# Altium PCB Headstage_withFPGA.PcbDoc
Units mm, origin at the board's own origin, x right, y up, seen from the top; angles counter-clockwise.
Board outline 41.84 x 41.84 mm, 2 copper layers (Top Layer, Bottom Layer); 1 components, 0 nets, 144 pads, 0 vias.
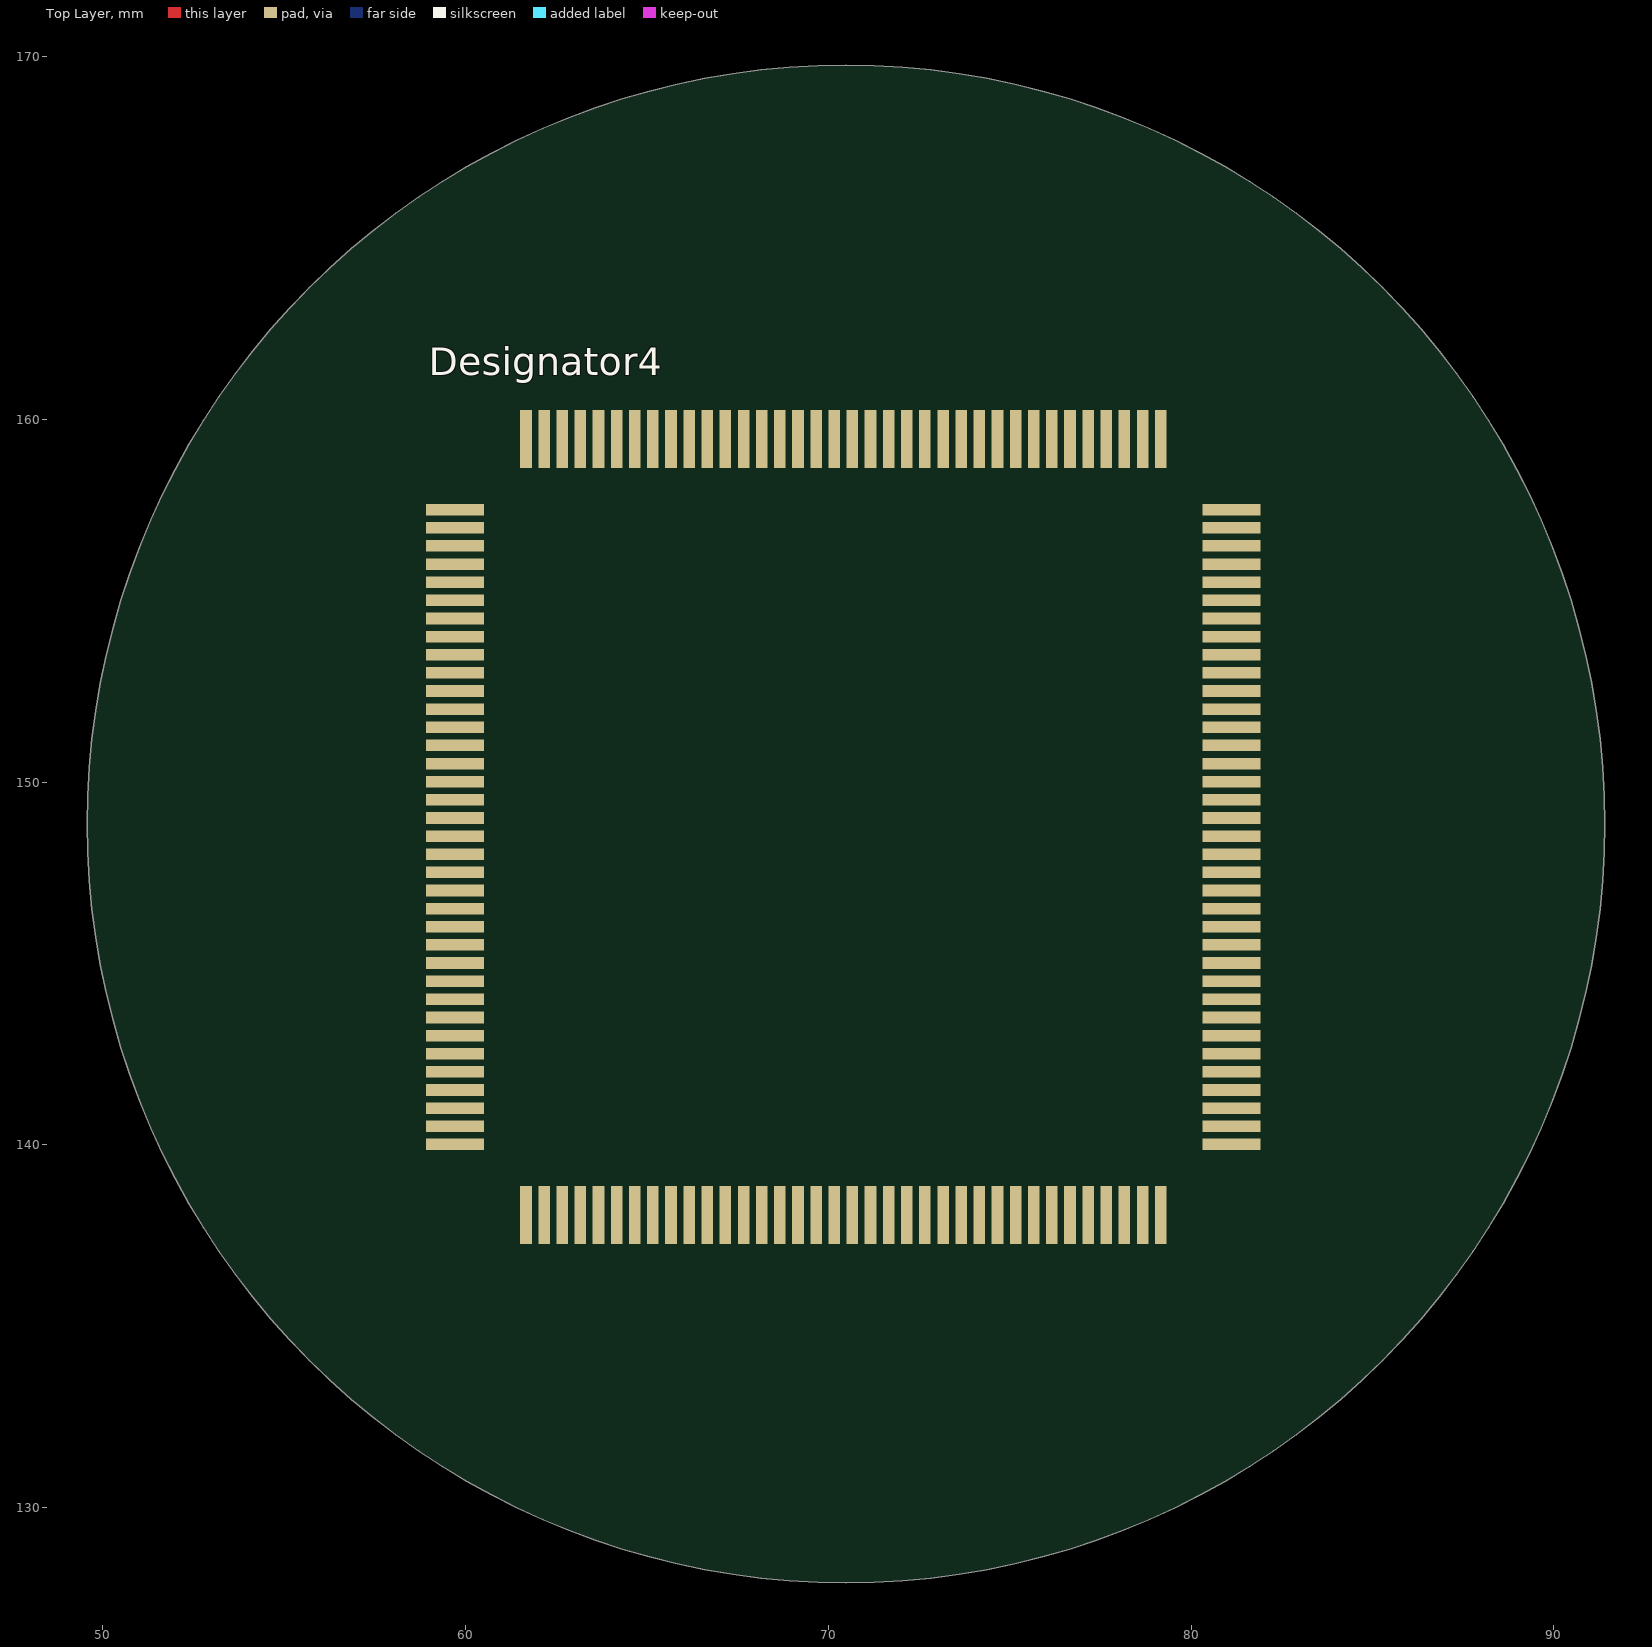
[diagram p0: Top Layer view]
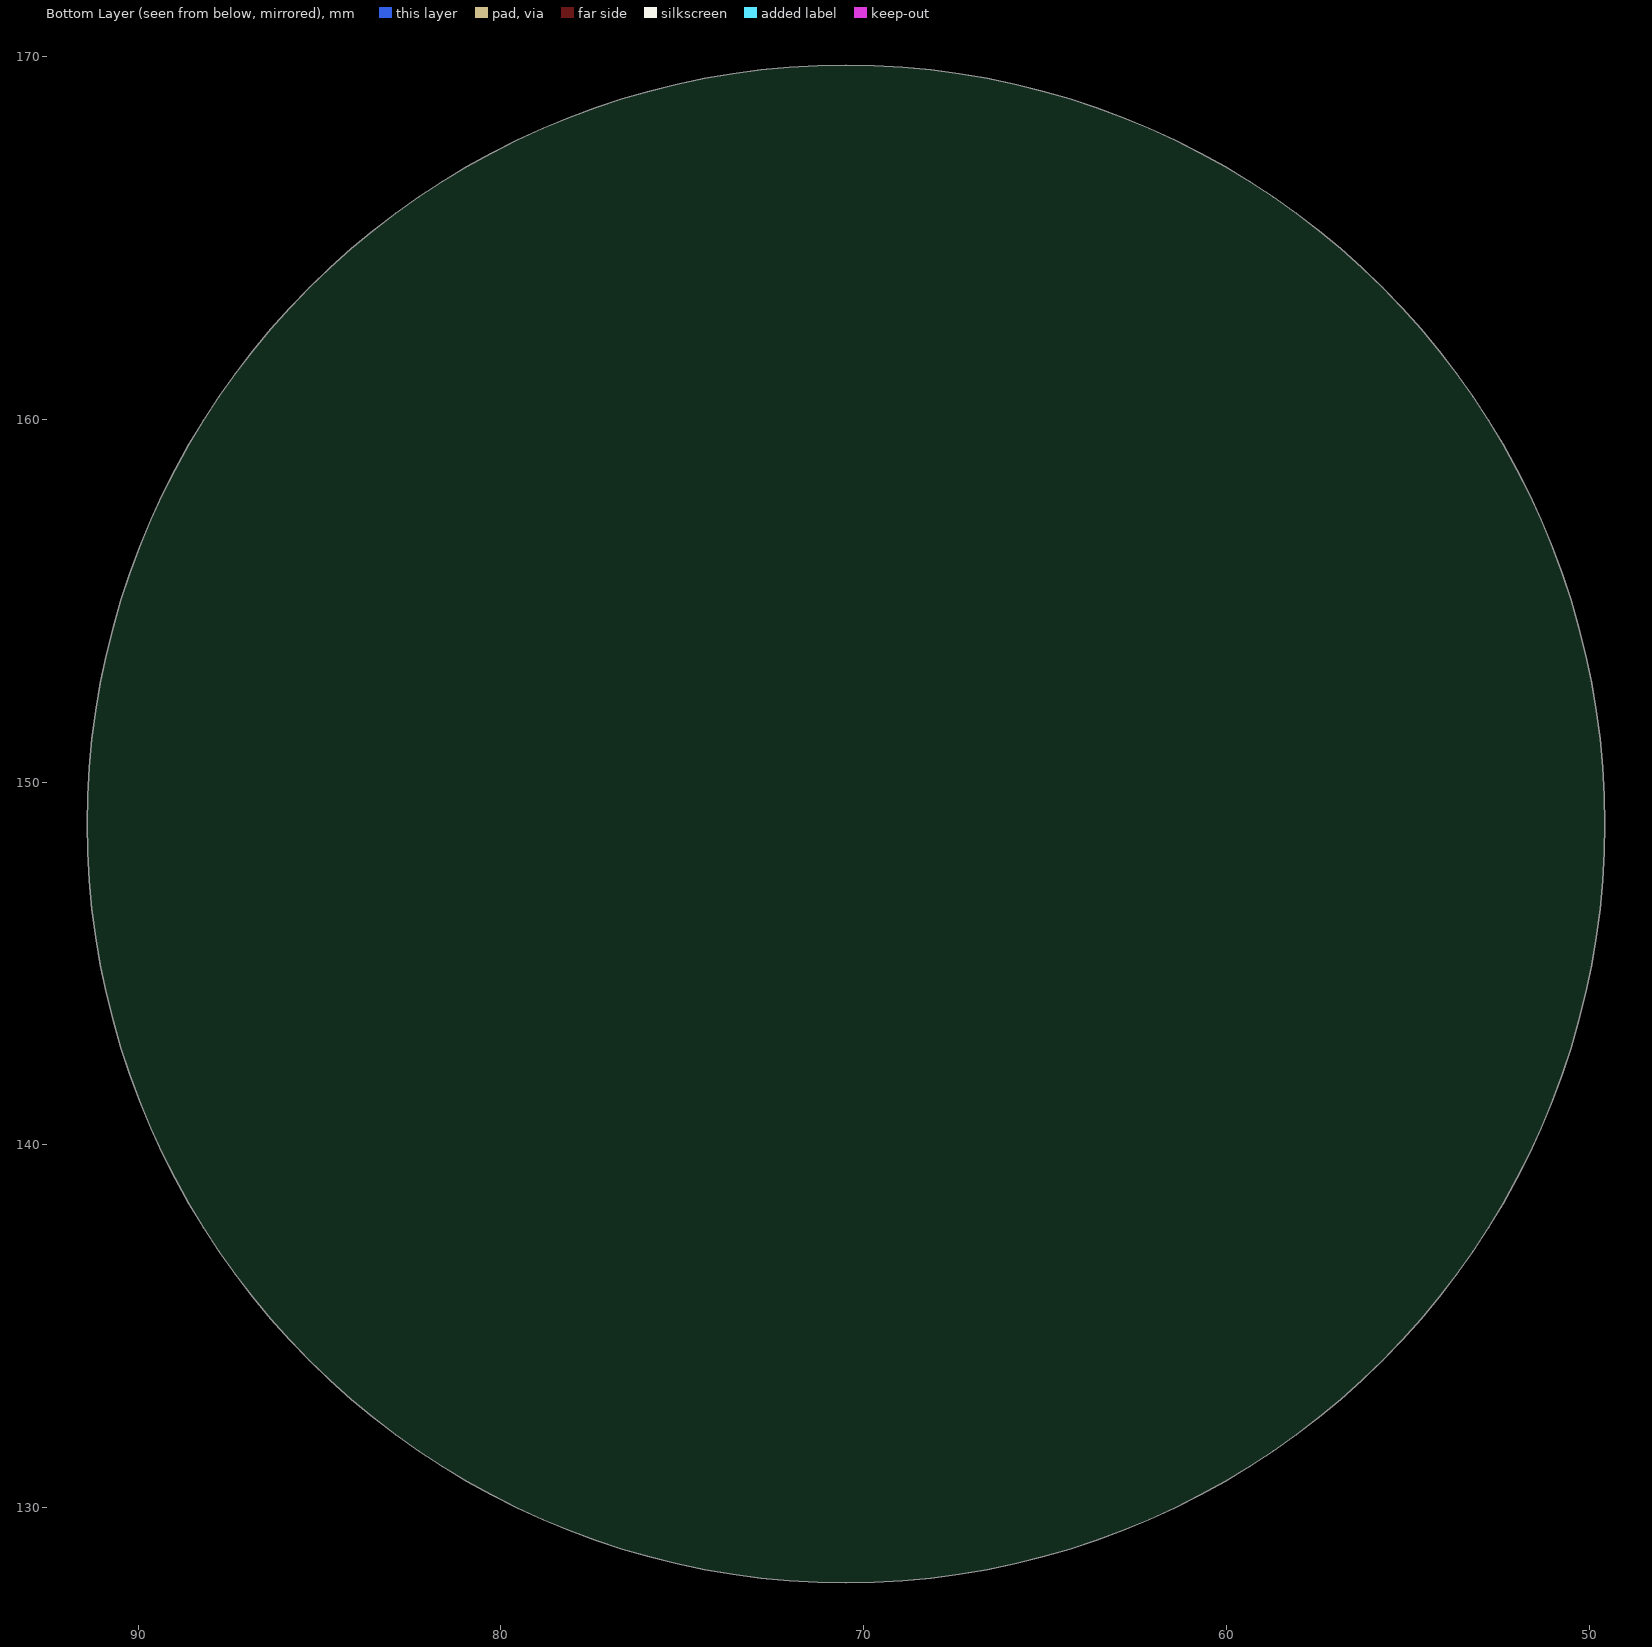
[diagram p1: Bottom Layer view, seen from below]

## Layer stack, top to bottom
Top Layer: signal copper 0.0356
Dielectric: dielectric 0.32, FR-4, Dk 4.8
Bottom Layer: signal copper 0.0356

## Board outline
70.485,127.923 cw(c70.485,148.844) 49.564,148.844 cw(c70.485,148.844) 70.485,169.765 cw(c70.485,148.844) 91.406,148.844 cw(c70.485,148.844)

## Design rules (kind name [scope] priority, off if disabled: settings)
Clearance [All] p1: gap=0.254
PolygonConnect [All] p1: connectstyle=Relief reliefconductorwidth=0.254 reliefentries=4 polygonreliefangle="90 Angle" airgapwidth=0.254
RoutingVias [All] p1: holewidth=0.711 width=1.27 viastyle="Through Hole" minholewidth=0.711 minwidth=1.27 maxholewidth=0.711 maxwidth=1.27
SolderMaskExpansion [All] p1: expansion=0.102
Width [All] p1: maxlimit=0.254 minlimit=0.254 preferedwidth=0.254
28 further rules are at their usual default settings.

## Components (designator, comment, footprint, x,y, rotation, side; value= is the part's Value field where it differs from the comment)
Designator4 "Comment" TQG144 58.293,141.986 r0 top

## Footprints (in the part's own frame and the unit in brackets; to place one, negate y for a bottom-side part, rotate by r counter-clockwise, add the part's x,y. Pads: shape width x height; smd on the part's side, far side on the other; paste and mask are expansions set on the pad)
TQG144 [mm]
  rect 1.6x0.32 smd mask+0.06: P1(1.418,15.524) P2(1.418,15.024) P3(1.418,14.524) P4(1.418,14.024) P5(1.418,13.524) P6(1.418,13.024) P7(1.418,12.524) P8(1.418,12.024) P9(1.418,11.524) P10(1.418,11.024) P11(1.418,10.524) P12(1.418,10.024) P13(1.418,9.524) P14(1.418,9.024) P15(1.418,8.524) P16(1.418,8.024) P17(1.418,7.524) P18(1.418,7.024) P19(1.418,6.524) P20(1.418,6.024) P21(1.418,5.524) P22(1.418,5.024) P23(1.418,4.524) P24(1.418,4.024) P25(1.418,3.524) P26(1.418,3.024) P27(1.418,2.524) P28(1.418,2.024) P29(1.418,1.524) P30(1.418,1.024) P31(1.418,0.524) P32(1.418,0.024) P33(1.418,-0.476) P34(1.418,-0.976) P35(1.418,-1.476) P36(1.418,-1.976) P73(22.818,-1.976) P74(22.818,-1.476) P75(22.818,-0.976) P76(22.818,-0.476) P77(22.818,0.024) P78(22.818,0.524) P79(22.818,1.024) P80(22.818,1.524) P81(22.818,2.024) P82(22.818,2.524) P83(22.818,3.024) P84(22.818,3.524) P85(22.818,4.024) P86(22.818,4.524) P87(22.818,5.024) P88(22.818,5.524) P89(22.818,6.024) P90(22.818,6.524) P91(22.818,7.024) P92(22.818,7.524) P93(22.818,8.024) P94(22.818,8.524) P95(22.818,9.024) P96(22.818,9.524) P97(22.818,10.024) P98(22.818,10.524) P99(22.818,11.024) P100(22.818,11.524) P101(22.818,12.024) P102(22.818,12.524) P103(22.818,13.024) P104(22.818,13.524) P105(22.818,14.024) P106(22.818,14.524) P107(22.818,15.024) P108(22.818,15.524)
  rect 0.32x1.6 smd mask+0.06: P37(3.368,-3.925) P38(3.868,-3.925) P39(4.368,-3.925) P40(4.868,-3.925) P41(5.368,-3.925) P42(5.868,-3.925) P43(6.368,-3.925) P44(6.868,-3.925) P45(7.368,-3.925) P46(7.868,-3.925) P47(8.368,-3.925) P48(8.868,-3.925) P49(9.368,-3.925) P50(9.868,-3.925) P51(10.368,-3.925) P52(10.868,-3.925) P53(11.368,-3.925) P54(11.868,-3.925) P55(12.368,-3.925) P56(12.868,-3.925) P57(13.368,-3.925) P58(13.868,-3.925) P59(14.368,-3.925) P60(14.868,-3.925) P61(15.368,-3.925) P62(15.868,-3.925) P63(16.368,-3.925) P64(16.868,-3.925) P65(17.368,-3.925) P66(17.868,-3.925) P67(18.368,-3.925) P68(18.868,-3.925) P69(19.368,-3.925) P70(19.868,-3.925) P71(20.368,-3.925) P72(20.868,-3.925) P109(20.868,17.475) P110(20.368,17.475) P111(19.868,17.475) P112(19.368,17.475) P113(18.868,17.475) P114(18.368,17.475) P115(17.868,17.475) P116(17.368,17.475) P117(16.868,17.475) P118(16.368,17.475) P119(15.868,17.475) P120(15.368,17.475) P121(14.868,17.475) P122(14.368,17.475) P123(13.868,17.475) P124(13.368,17.475) P125(12.868,17.475) P126(12.368,17.475) P127(11.868,17.475) P128(11.368,17.475) P129(10.868,17.475) P130(10.368,17.475) P131(9.868,17.475) P132(9.368,17.475) P133(8.868,17.475) P134(8.368,17.475) P135(7.868,17.475) P136(7.368,17.475) P137(6.868,17.475) P138(6.368,17.475) P139(5.868,17.475) P140(5.368,17.475) P141(4.868,17.475) P142(4.368,17.475) P143(3.868,17.475) P144(3.368,17.475)

## Nets (pads, with @x,y where several pads share a name; then routed paths per layer and width w, separated by ;. In a path a pad name is that pad's centre, name@x,y a point inside that pad or via, vN(x,y) a via of type N, cw(c..) or ccw(c..) an arc to the next point about the centre after c; other vN are vias at no path point)
pads on no net: Designator4.P1 Designator4.P2 Designator4.P3 Designator4.P4 Designator4.P5 Designator4.P6 Designator4.P7 Designator4.P8 Designator4.P9 Designator4.P10 Designator4.P11 Designator4.P12 Designator4.P13 Designator4.P14 Designator4.P15 Designator4.P16 Designator4.P17 Designator4.P18 Designator4.P19 Designator4.P20 Designator4.P21 Designator4.P22 Designator4.P23 Designator4.P24 Designator4.P25 Designator4.P26 Designator4.P27 Designator4.P28 Designator4.P29 Designator4.P30 Designator4.P31 Designator4.P32 Designator4.P33 Designator4.P34 Designator4.P35 Designator4.P36 Designator4.P37 Designator4.P38 Designator4.P39 Designator4.P40 Designator4.P41 Designator4.P42 Designator4.P43 Designator4.P44 Designator4.P45 Designator4.P46 Designator4.P47 Designator4.P48 Designator4.P49 Designator4.P50 Designator4.P51 Designator4.P52 Designator4.P53 Designator4.P54 Designator4.P55 Designator4.P56 Designator4.P57 Designator4.P58 Designator4.P59 Designator4.P60 Designator4.P61 Designator4.P62 Designator4.P63 Designator4.P64 Designator4.P65 Designator4.P66 Designator4.P67 Designator4.P68 Designator4.P69 Designator4.P70 Designator4.P71 Designator4.P72 Designator4.P73 Designator4.P74 Designator4.P75 Designator4.P76 Designator4.P77 Designator4.P78 Designator4.P79 Designator4.P80 Designator4.P81 Designator4.P82 Designator4.P83 Designator4.P84 Designator4.P85 Designator4.P86 Designator4.P87 Designator4.P88 Designator4.P89 Designator4.P90 Designator4.P91 Designator4.P92 Designator4.P93 Designator4.P94 Designator4.P95 Designator4.P96 Designator4.P97 Designator4.P98 Designator4.P99 Designator4.P100 Designator4.P101 Designator4.P102 Designator4.P103 Designator4.P104 Designator4.P105 Designator4.P106 Designator4.P107 Designator4.P108 Designator4.P109 Designator4.P110 Designator4.P111 Designator4.P112 Designator4.P113 Designator4.P114 Designator4.P115 Designator4.P116 Designator4.P117 Designator4.P118 Designator4.P119 Designator4.P120 Designator4.P121 Designator4.P122 Designator4.P123 Designator4.P124 Designator4.P125 Designator4.P126 Designator4.P127 Designator4.P128 Designator4.P129 Designator4.P130 Designator4.P131 Designator4.P132 Designator4.P133 Designator4.P134 Designator4.P135 Designator4.P136 Designator4.P137 Designator4.P138 Designator4.P139 Designator4.P140 Designator4.P141 Designator4.P142 Designator4.P143 Designator4.P144